# Altium PCB opemv.PcbDoc
Units mil, origin at the board's own origin, x right, y up, seen from the top; angles counter-clockwise.
Board outline 1380.03 x 950.03 mil, 2 copper layers (Top Layer, Bottom Layer); 3 components, 4 nets, 20 pads, 0 vias.
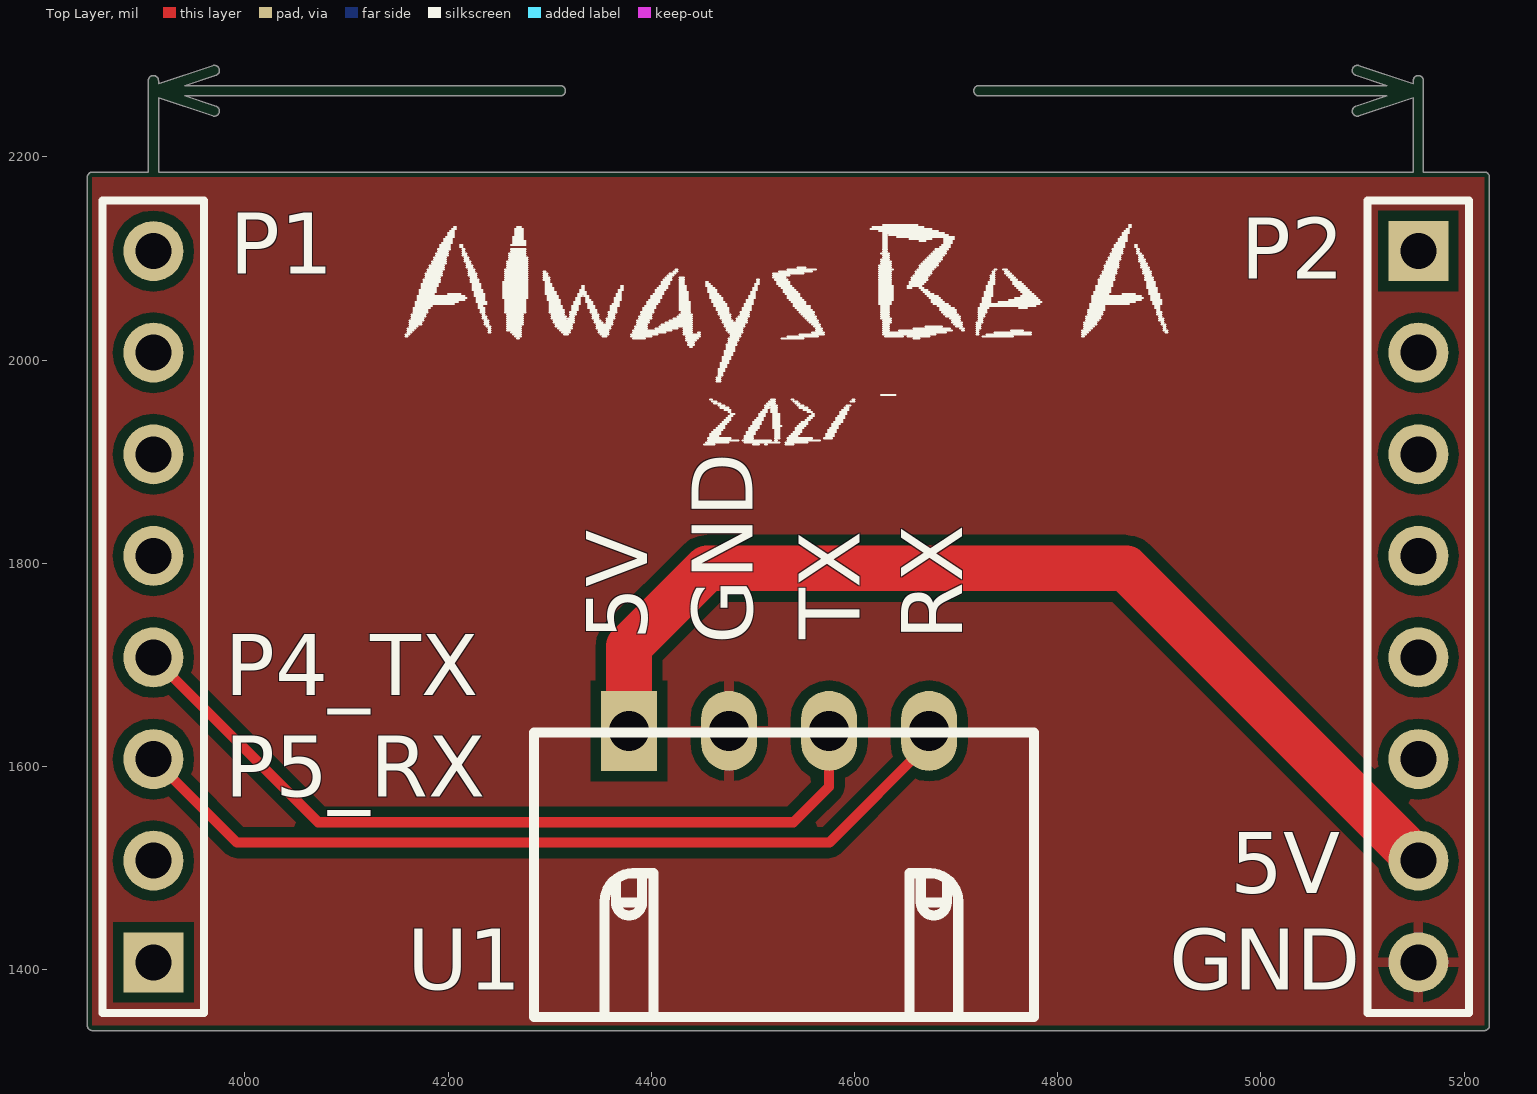
[diagram p0: Top Layer view]
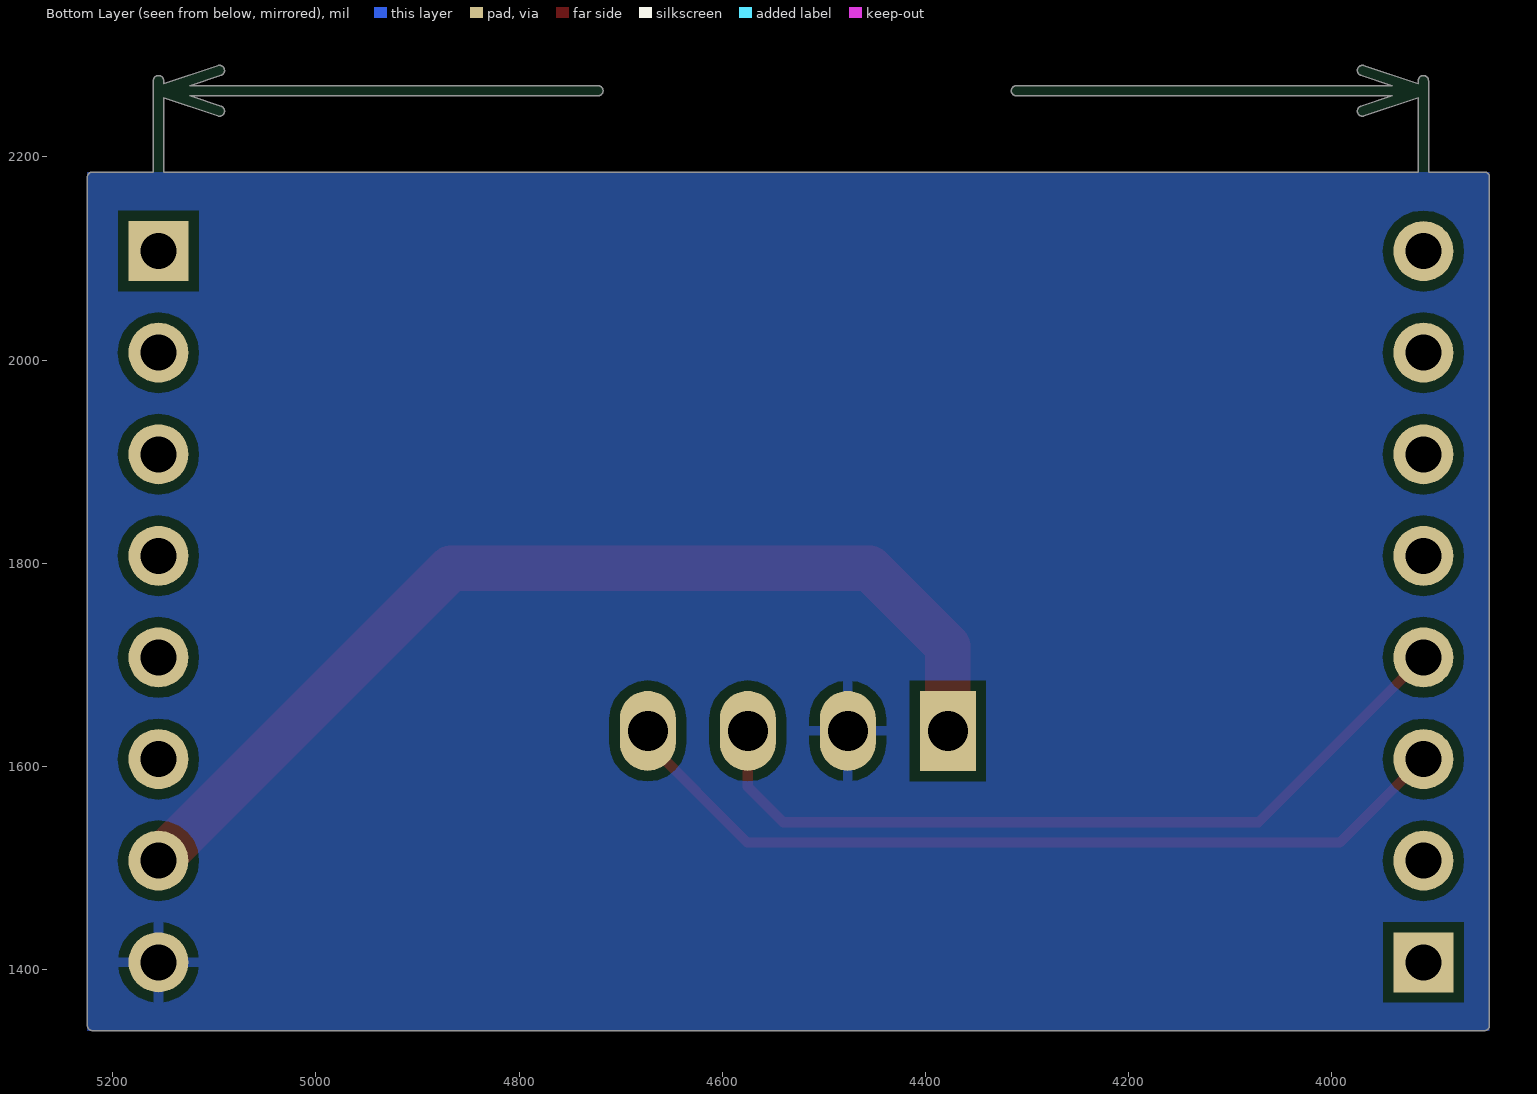
[diagram p1: Bottom Layer view, seen from below]

## Layer stack, top to bottom
Top Solder: solder mask 0.4, Solder Resist, Dk 3.5
Top Layer: signal copper 1.4
Dielectric 1: dielectric 12.6, FR-4, Dk 4.8
Bottom Layer: signal copper 1.4
Bottom Solder: solder mask 0.4, Solder Resist, Dk 3.5

## Board outline
3844.99,1345.24 cw(c3850,1345.47) 3845.06,1346.35 3845.06,2179.13 cw(c3850,2180) 3850,2185.01 3904.99,2185.01 3904.99,2275 cw(c3910,2275) 3915.01,2275 3915.01,2271.96 3968.41,2289.76 cw(c3970,2285) 3975.01,2285 cw(c3970,2285) 3971.59,2280.24 3940.9,2270.01 4310.56,2270.01 cw(c4310.56,2265) 4315.58,2265 cw(c4310.56,2265) 4310.56,2259.99 3940.9,2259.99 3971.59,2249.76 cw(c3970,2245) 3975.01,2245 cw(c3970,2245) 3968.41,2240.24 3915.01,2258.04 3915.01,2185.01 5149.98,2185.01 5149.98,2258.04 5096.59,2240.24 cw(c5095,2245) 5093.41,2249.76 5124.1,2259.99 4722.44,2259.99 cw(c4722.44,2265) 4722.44,2270.01 5124.1,2270.01 5093.41,2280.24 cw(c5095,2285) 5096.59,2289.76 5149.98,2271.96 5149.98,2275 cw(c5155,2275) 5160.02,2275 5160.02,2185.01 5220,2185.01 cw(c5220,2180) 5225.02,2180 5225.02,1345 cw(c5220,1345) 5220,1339.98 3850,1339.98 cw(c3850,1345)

## Design rules (kind name [scope] priority, off if disabled: settings)
Clearance [All] p1: gap=10 ignorepadtopadclearanceinfootprint=FALSE except(0: Arc-Hole Track-Hole SMDPad-Hole THPad-Hole Via-Hole Fill-Hole Poly-Hole Region-Hole Text-Hole)
PolygonConnect [All] p1: connectstyle=Relief reliefconductorwidth=10 reliefentries=4 polygonreliefangle="90 Angle" airgapwidth=10
RoutingVias [All] p1: holewidth=28 width=50 viastyle="Through Hole" minholewidth=28 minwidth=50 maxholewidth=28 maxwidth=50
SolderMaskExpansion [All] p1: expansion=4 istentingtop=FALSE
Width [All] p1: maxlimit=50 minlimit=10 preferedwidth=45
30 further rules are at their usual default settings.

## Classes and differential pairs
component class openmv-Layout: P1 U1

## Components (designator, comment, footprint, x,y, rotation, side; value= is the part's Value field where it differs from the comment)
P1 "Header 8" HDR1X8 3910,1407.24 r90 top (schematic designator P?)
P2 "Header 8" HDR1X8 5155,2107.24 r270 top (schematic designator P?)
U1 "串口通信" J-XH-4AW短 4525.79,1635 r0 top (schematic designator U?)

## Footprints (in the part's own frame and the unit in brackets; to place one, negate y for a bottom-side part, rotate by r counter-clockwise, add the part's x,y. Pads: shape width x height; smd on the part's side, far side on the other; paste and mask are expansions set on the pad)
HDR1X8 [mm] "Connector; Header; 8 Position"
  rect 1.5x1.5 hole 0.9: 1(0,0)
  round 1.5 hole 0.9: 2(2.54,0) 3(5.08,0) 4(7.62,0) 5(10.16,0) 6(12.7,0) 7(15.24,0) 8(17.78,0)
  silkscreen extent -1.27,-1.27 19.05,1.27
J-XH-4AW短 [mm]
  rect 1.4x2 hole 1: 1(-3.75,0)
  oval 1.4x2 hole 1: 2(-1.25,0) 3(1.25,0) 4(3.75,0)
  silkscreen extent -6.13,-7.16 6.37,-0.04, body extent -6.15,-7.23 6.35,0.37, height 5.9

## Part data
P1 P2: "Header, 8-Pin", LatestRevisionDate=17-Jul-2002, LatestRevisionNote="Re-released for DXP Platform.", Publisher="Altium Limited"
U1: library part XH2.54插座-4P

## Nets (pads, with @x,y where several pads share a name; then routed paths per layer and width w, separated by ;. In a path a pad name is that pad's centre, name@x,y a point inside that pad or via, vN(x,y) a via of type N, cw(c..) or ccw(c..) an arc to the next point about the centre after c; other vN are vias at no path point)
5V: P2.7 U1.1 | length 1011
  Top Layer w45: U1.1 4378.15,1718.15 4455,1795 4867.24,1795 P2.7
GND: P2.8 U1.2
P4: P1.4 U1.3 | length 801.7
  Top Layer w10: P1.4 4072.24,1545 4540,1545 4575,1580 U1.3
P5: P1.3 U1.4 | length 850
  Top Layer w10: P1.3 3992.24,1525 4575.24,1525 4673.43,1623.19 U1.4
pads on no net: P1.1 P1.2 P1.5 P1.6 P1.7 P1.8 P2.1 P2.2 P2.3 P2.4 P2.5 P2.6

## Polygon pours and split planes (outlines as drawn)
GND on Top Layer "GND_L01_P000" (solid, remove dead copper, pour order 0): 3850,2180 5220,2180 5220,1345 3850,1345
GND on Bottom Layer "GND_L02_P001" (solid, remove dead copper, pour order 1): 3845,2185 5225,2185 5225,1340 3845,1340

## Silkscreen, mask and mechanical layers (free items; w line width, h text height)
Top Overlay:
  drawing of 803 lines, arcs and shapes, not listed
  text "TX" at 4605,1725 h60 r90
  text "5V" at 4396,1724 h60 r90
  text "RX" at 4706,1724 h60 r90
  text "GND" at 4500,1720 h60 r90
  text "P4_TX" at 3980,1670 h60
  text "P5_RX" at 3980,1570 h60
  text "5V" at 4970,1475 h60
  text "GND" at 4910,1380 h60
Mechanical 1:
  lines w10: 3850,1345 5220,1345 5220,2180 3850,2180 3850.08,2180 3850.08,1345 ; 3850,1345.47 3850.08,1345.47

## Dimensions
3910,2107.24 to 5155,1407.24 on Mechanical 1